# EAGLE board Led_lamp_Vero (EAGLE 7.7.0)
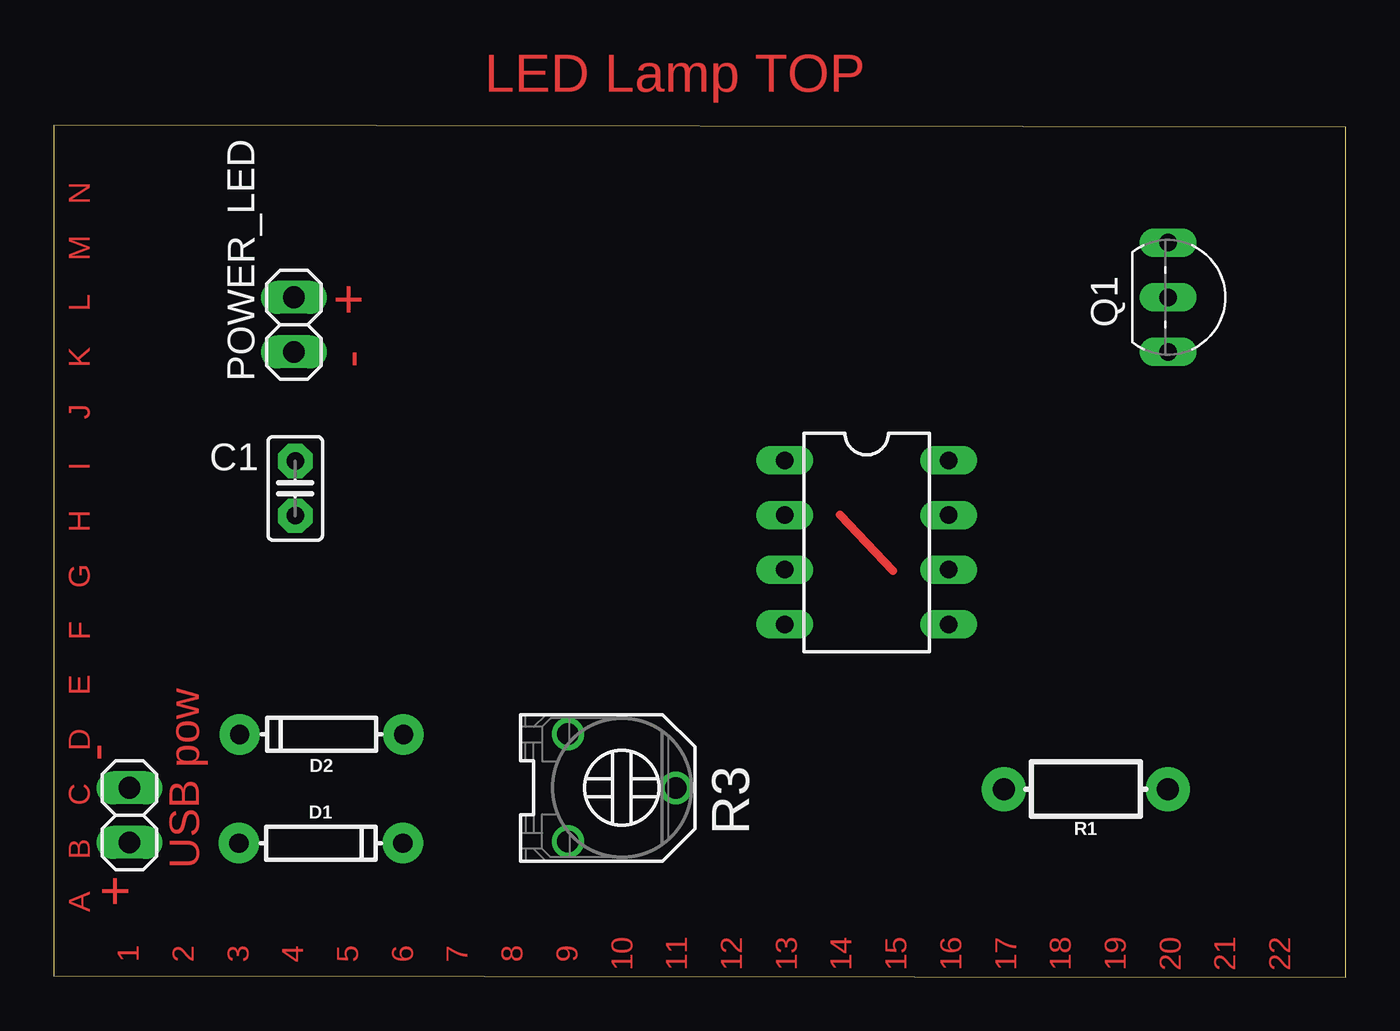
[diagram p0: board, top side]
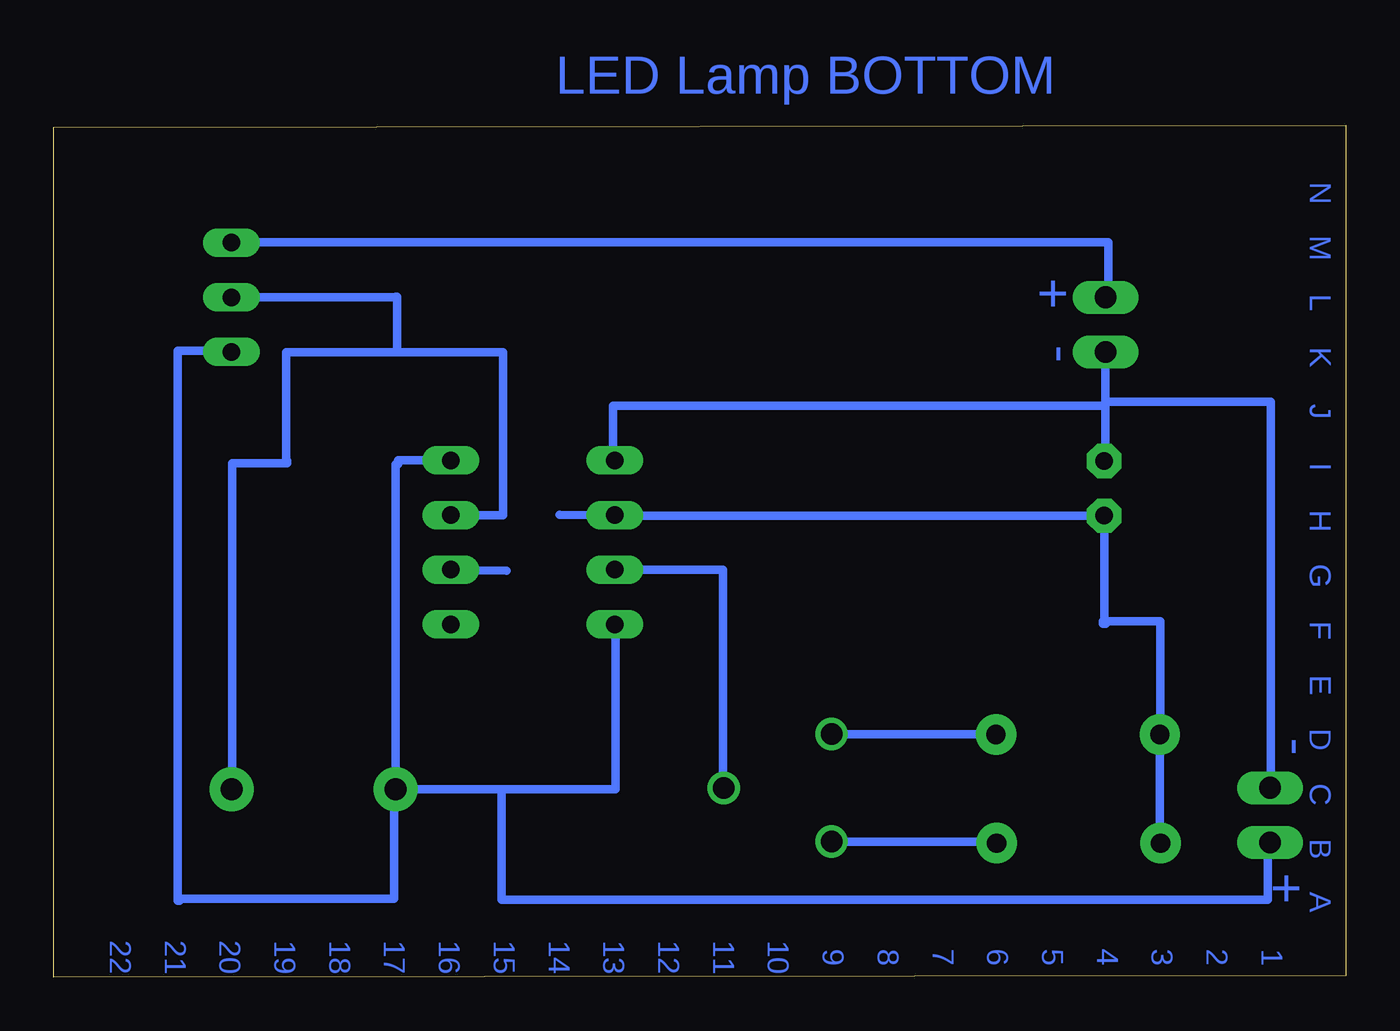
[diagram p1: board, bottom side, seen from below]

Size 60.09 x 39.59 mm. Coordinates in mm from the lower left corner, seen from the top.
Outline: 0,0.07 60.09,0 60.09,39.52 0,39.59 0,0.07
Copper layers (1*16): Top 0.035mm / dielectric 1.5mm / Bottom 0.035mm
Design rules "default": minimum track width 10mil, minimum drill 24mil, track to track 8mil, track to pad 8mil, pad to pad 8mil, via to via 8mil, smd to smd 8mil, copper to edge 40mil, drill to drill 8mil, minimum pad ring 10mil, minimum via ring 8mil, stop-mask expansion 4mil, vias tented up to drill 0mil, thermal gap 10mil

## Footprints (pad centres in the part's own frame; a part is rotated, then mirrored left to right if it is on the bottom)
C0.1PTH = drill 0.813 pad 1.6 octagon: 1 -1.27,0; 2 1.27,0
DIODE-1N4148 = drill 0.9 pad 1.88: A -3.81,0; C 3.81,0
DIL-08 = drill 0.813 long: 1 -3.81,-3.81; 2 -1.27,-3.81; 3 1.27,-3.81; 4 3.81,-3.81; 5 3.81,3.81; 6 1.27,3.81; 7 -1.27,3.81; 8 -3.81,3.81
1X02 = drill 1.016 long: 1 -1.27,0; 2 1.27,0
TO92-EBC = drill 0.813 long: B 0,-1.27; C 2.54,-1.27; E -2.54,-1.27
AXIAL-0.3-KIT = drill 1.016 pad 2.032: P$1 -3.81,0; P$2 3.81,0
TRIMMER_3306F = drill 1: 1 -2.5,-2.5; 2 0,2.5; 3 2.5,-2.5

## Placement (x,y rotation side)
1  [1X14]  3.54,20.19 90 top
2  [1X14]  6.08,20.19 90 top
4  [1X14]  11.16,20.19 90 top
C1  0.1uf  [C0.1PTH]  11.23,22.72 90 top
D1  1N4148  [DIODE-1N4148]  12.42,6.23 0 top
D2  1N4148  [DIODE-1N4148]  12.46,11.29 180 top
IC1  NE555  [DIL-08]  37.81,20.21 270 top
JP1  [1X02]  3.52,7.53 90 top
JP3  [1X14]  8.62,20.19 90 top
JP5  [1X14]  13.7,20.19 90 top
JP6  [1X14]  16.24,20.19 90 top
JP7  [1X14]  18.78,20.19 90 top
JP8  [1X14]  21.32,20.19 90 top
JP9  [1X14]  23.86,20.19 90 top
JP10  [1X14]  26.4,20.19 90 top
JP11  [1X14]  28.94,20.19 90 top
JP12  [1X14]  31.48,20.19 90 top
JP13  [1X14]  34.02,20.19 90 top
JP14  [1X14]  36.56,20.19 90 top
JP15  [1X14]  39.1,20.19 90 top
JP16  [1X14]  41.64,20.19 90 top
JP17  [1X14]  44.18,20.19 90 top
JP18  [1X14]  46.72,20.19 90 top
JP19  [1X14]  49.26,20.19 90 top
JP20  [1X14]  51.8,20.19 90 top
JP21  [1X14]  54.34,20.19 90 top
JP22  [1X14]  56.88,20.19 90 top
POWER_LED  [1X02]  11.17,30.33 90 top
Q1  2N2222  [TO92-EBC]  53.09,31.61 270 top
R1  4.7k  [AXIAL-0.3-KIT]  48,8.74 180 top
R3  10k  [TRIMMER_3306F]  26.42,8.8 270 top

## Library data of the parts
1 2 4 JP3 JP5-JP22 = pinhead_1x14_no_frame MOD
C1 R3 = dp_devices.v6
D1 D2 = SparkFun-DiscreteSemi; PROD_ID: DIO-08378
IC1 = st-microelectronics; MF: Arrow Electronics; MPN: NE555N; OC_FARNELL: 1467742; OC_NEWARK: 89K1486
JP1 POWER_LED = pinhead
Q1 = transistor-neu-to92
R1 = SparkFun-Resistors; PROD_ID: RES-12180

## Nets
GND: C1.2 IC1.1 JP1.2 POWER_LED.1
N$1: IC1.7 Q1.B R1.P$1
N$2: C1.1 D1.A D2.C IC1.2 IC1.6
N$3: D1.C R3.3
N$4: D2.A R3.1
N$5: IC1.3 R3.2
N$7: POWER_LED.2 Q1.E
VCC: IC1.4 IC1.8 JP1.1 Q1.C R1.P$2

## Tracks (layer width: path | path; a pad name or v marks a point on that pad's centre or on a via)
GND
  Bottom 0.406: 11.17,26.75 POWER_LED.1 | 11.17,26.56 34.08,26.56 34.08,24.02 IC1.1 | JP1.2 3.48,8.8 3.48,26.75 11.17,26.75 | 11.17,26.75 11.17,26.56 | C1.2 11.17,23.99 11.17,26.56
N$1
  Bottom 0.406: R1.P$1 51.79,8.74 51.79,23.89 49.24,23.89 49.24,24.01 49.28,24.01 49.28,29.04 | 49.28,29.04 49.28,29.05 | 44.13,29.04 39.19,29.04 39.19,21.48 IC1.7 | 44.13,29.04 49.28,29.04 | Q1.B 44.19,31.61 44.19,31.64 44.13,31.64 44.13,29.04
N$2
  Top 0.406: 39.02,18.9 36.56,21.51
  Bottom 0.406: D1.A 8.65,6.23 D2.C 8.63,11.29 8.63,16.55 11.23,16.55 | 11.15,16.43 11.3,16.43 11.3,16.55 11.23,16.55 | IC1.6 39.02,18.9 | 36.56,21.51 IC1.2 | 11.23,16.55 C1.1 34,21.45 IC1.2 | 34,21.33 IC1.2
N$3
  Bottom 0.406: R3.3 16.23,6.3 D1.C
N$4
  Bottom 0.406: R3.1 16.27,11.3 D2.A
N$5
  Bottom 0.406: R3.2 28.96,8.8 28.96,18.94 IC1.3
N$7
  Bottom 0.406: POWER_LED.2 11.05,31.6 11.05,34.15 Q1.E
VCC
  Bottom 0.406: IC1.8 44.07,24.02 44.07,23.83 44.19,23.83 R1.P$2 | R1.P$2 39.25,8.74 | 39.25,8.74 33.96,8.74 33.96,16.4 IC1.4 | R1.P$2 44.25,8.74 44.25,3.65 54.23,3.65 54.23,3.54 54.33,3.54 54.33,29.11 51.75,29.11 Q1.C | JP1.1 3.62,6.26 3.62,3.61 39.25,3.61 39.25,8.74

## Text on the board
Top: LED Lamp TOP | N | M | L | + | K | - | J | I | H | G | F | E | D | - | C | B | + | USB pow | A | 1 / 2 / 3 / 4 / 5 / 6 / 7 / 8 / 9 / 10 / 11 / 12 / 13 / 14 / 15 / 16 / 17 / 18 / 19 / 20 / 21 / 22
Bottom: LED Lamp BOTTOM | N | M | + | L | K | - | J | I | H | G | F | E | D | - | C | B | + | A | 1 / 2 / 3 / 4 / 5 / 6 / 7 / 8 / 9 / 10 / 11 / 12 / 13 / 14 / 15 / 16 / 17 / 18 / 19 / 20 / 21 / 22